# Altium PCB CW308T_MPC57.PcbDoc (part 1 of 2)
Units mil, origin at the board's own origin, x right, y up, seen from the top; angles counter-clockwise.
Board outline 2060 x 3180 mil, 4 copper layers (Component Side, Ground Plane, Power Plane, Solder Side), stack 33.234 mil thick; 90 components, 85 nets, 565 pads, 140 vias.
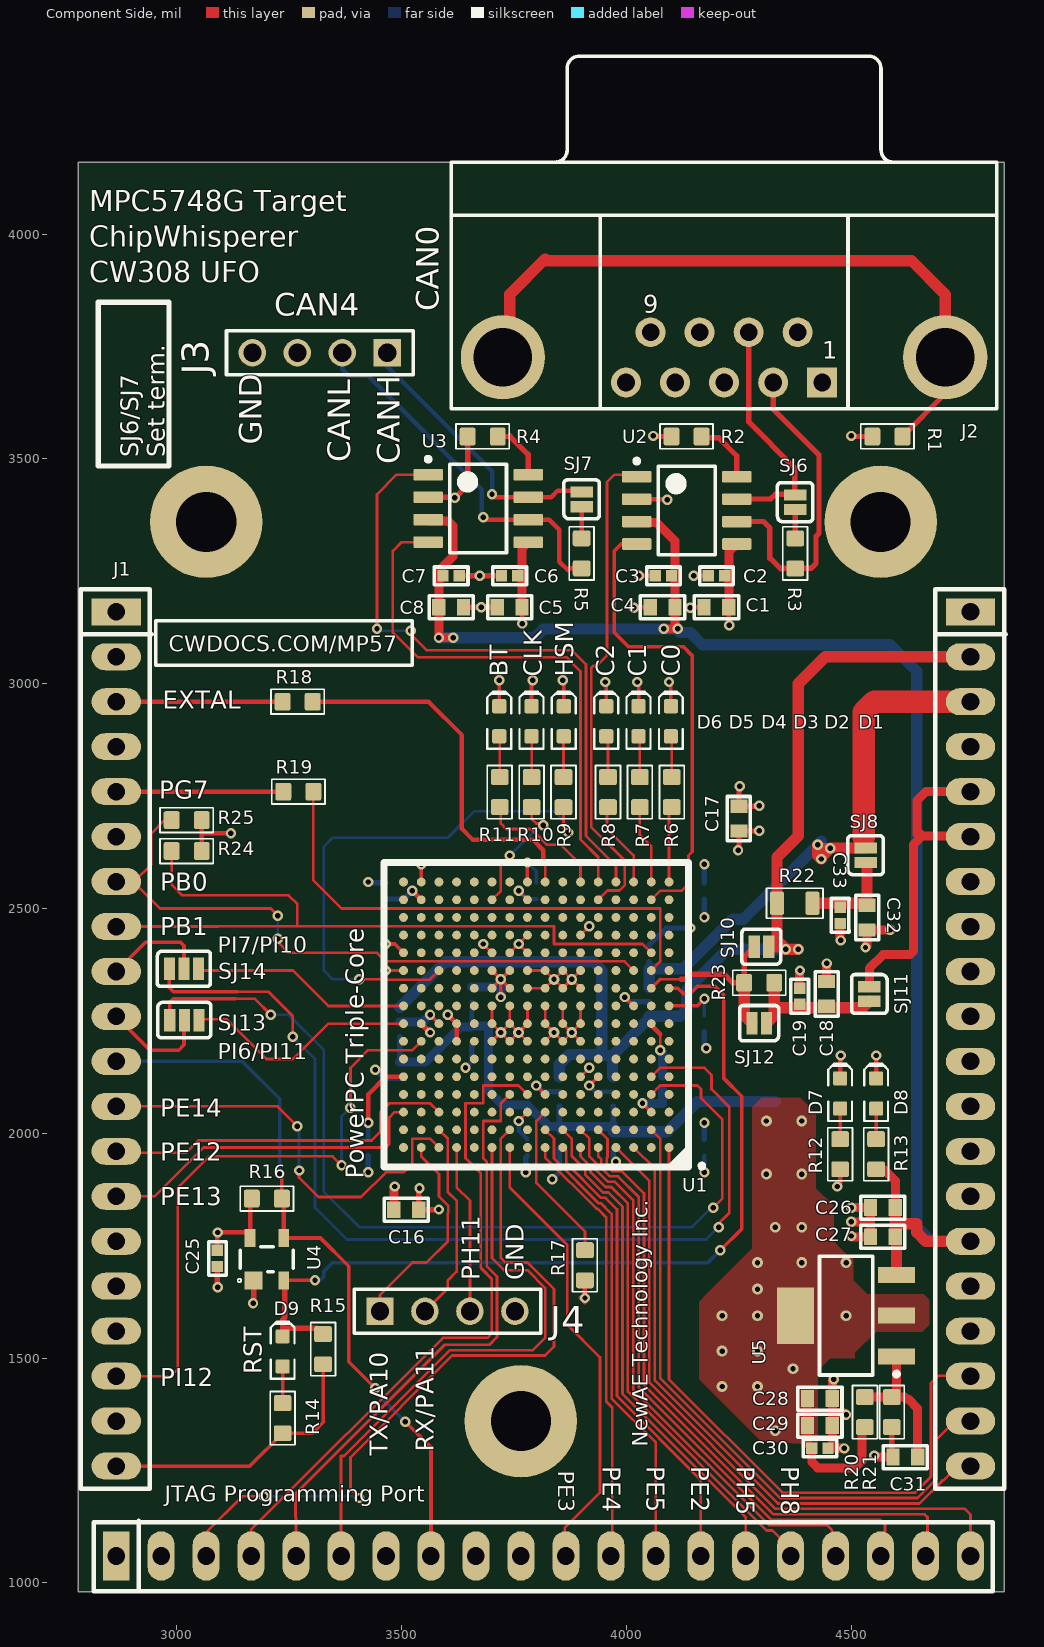
[diagram p0: Component Side view]
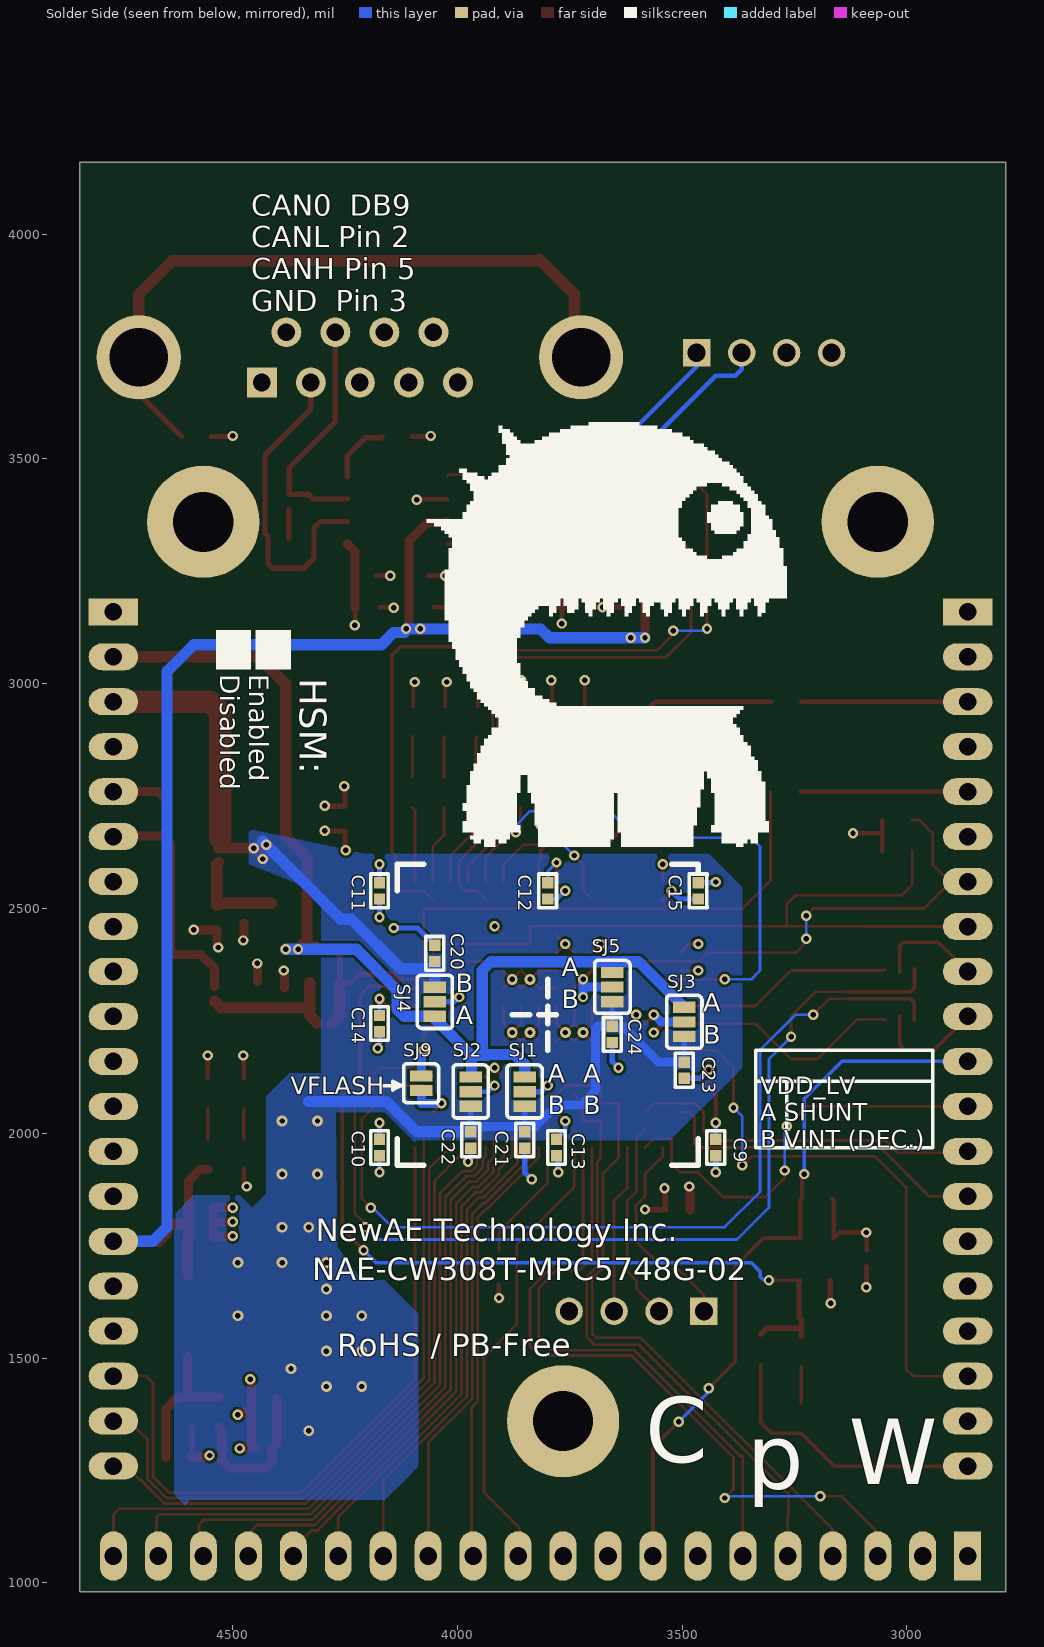
[diagram p1: Solder Side view, seen from below]
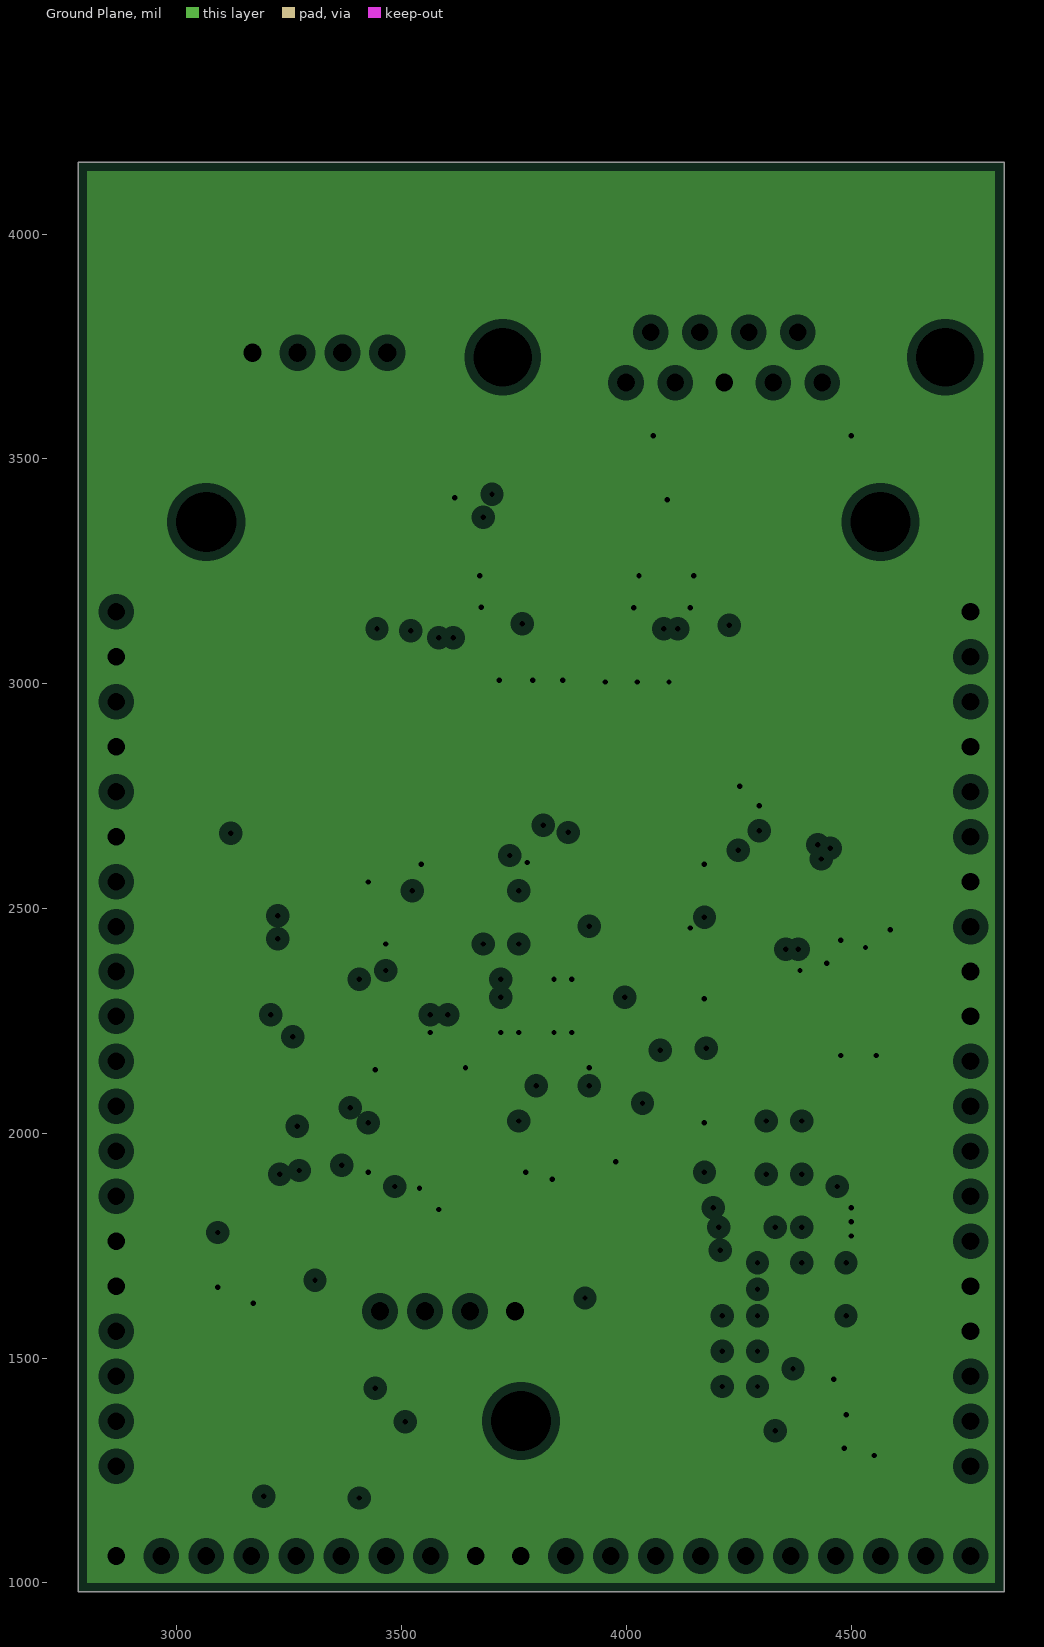
[diagram p2: Ground Plane, clearances drawn from the general rule]
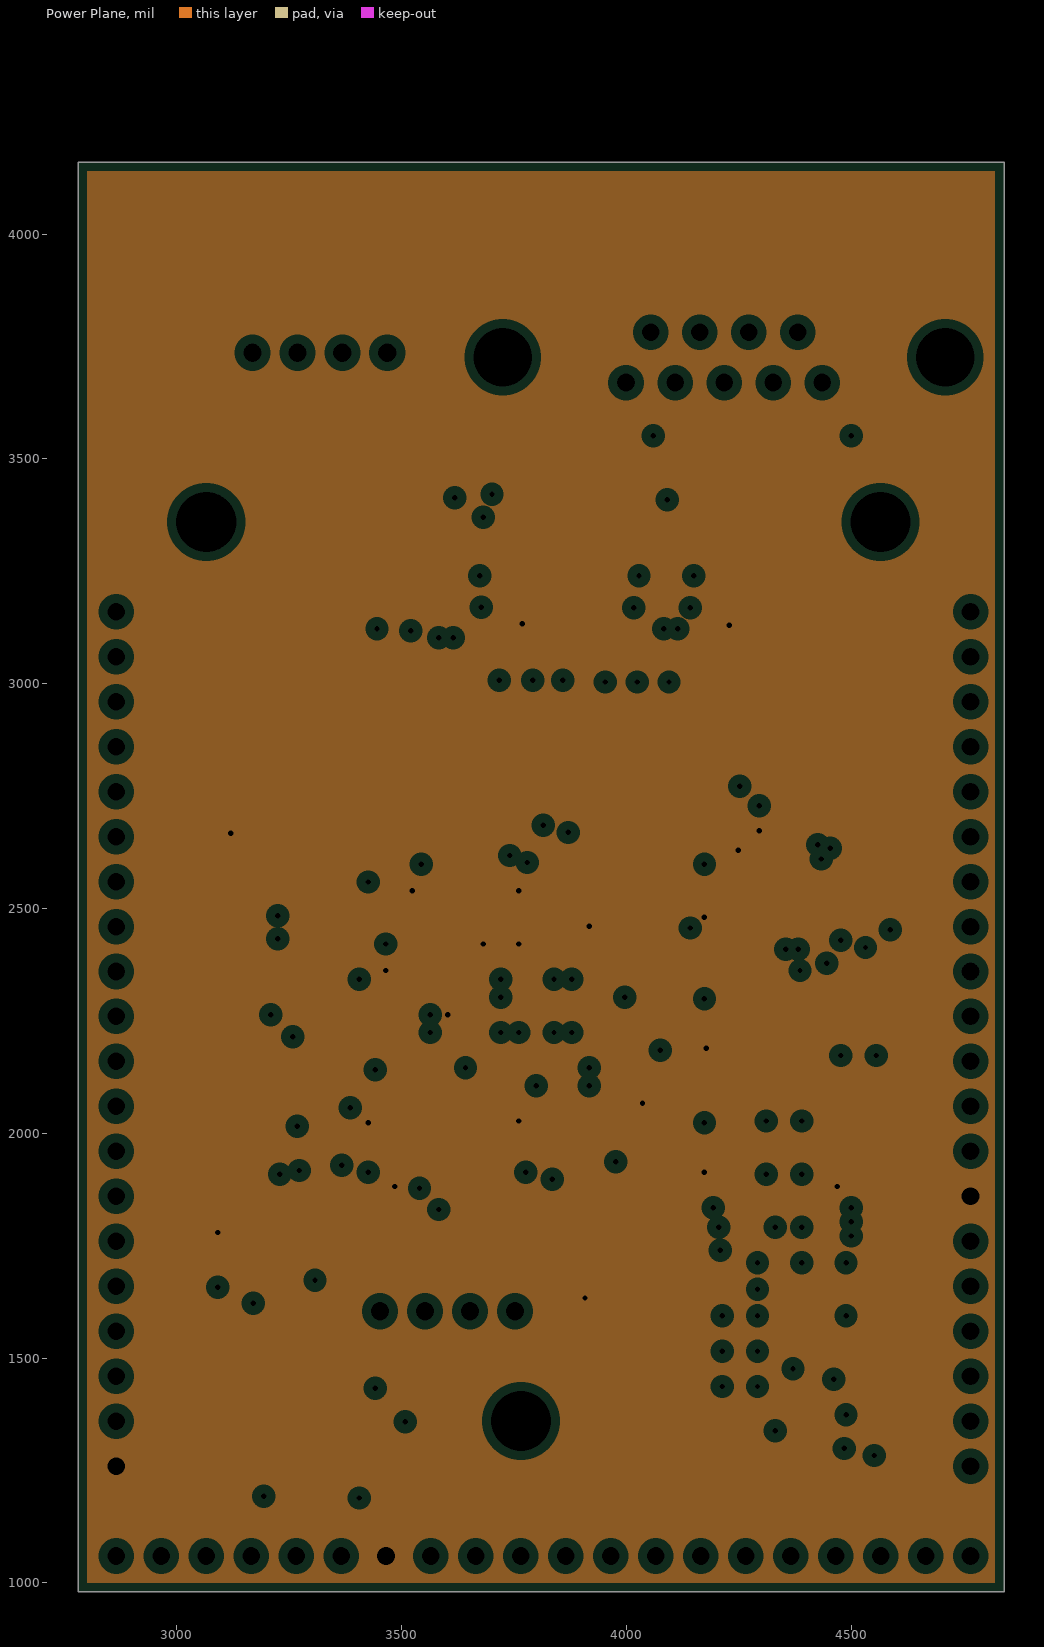
[diagram p3: Power Plane, clearances drawn from the general rule]

## Layer stack, top to bottom
Top Solder: solder mask 0.4, Solder Resist, Dk 3.5
Component Side: signal copper 1.4
Dielectric 1: core 12.6, FR-4, Dk 4.8
Ground Plane: plane copper 1.417, net GND
Dielectric 3: prepreg 5, Dk 4.2
Power Plane: plane copper 1.417, net VCCIO
Dielectric 4: core 10, Dk 4.2
Solder Side: signal copper 1.4
Bottom Solder: solder mask 0.4, Solder Resist, Dk 3.5

## Board outline
2780,980 4840,980 4840,4160 2780,4160

## Design rules (kind name [scope] priority, off if disabled: settings)
Clearance [All] p1: gap=6 ignorepadtopadclearanceinfootprint=FALSE except(0: Arc-Hole Track-Hole SMDPad-Hole THPad-Hole Via-Hole Fill-Hole Poly-Hole Region-Hole Text-Hole)
PlaneClearance [All] p1: clearance=20
PlaneConnect PlaneConnect_Via [isVia] p1: planeconnectstyle=Direct reliefexpansion=20 reliefentries=4 reliefconductorwidth=10 reliefairgap=10
PlaneConnect [All] p2: planeconnectstyle=Relief reliefexpansion=20 reliefentries=4 reliefconductorwidth=10 reliefairgap=10
PolygonConnect [All] p1: connectstyle=Direct reliefconductorwidth=10 reliefentries=4 polygonreliefangle="90 Angle" airgapwidth=10
RoutingVias [All] p1: holewidth=12 width=24 viastyle="Through Hole" minholewidth=12 minwidth=20 maxholewidth=28 maxwidth=50
SilkToSilkClearance [All] p1: silktosilkclearance=1
SilkToSolderMaskClearance [IsPad] p1: minsilkscreentomaskgap=2 clearancetoexposedcopper=TRUE
SolderMaskExpansion [All] p1: expansion=4
Width [All] p1: maxlimit=50 minlimit=6 preferedwidth=8 minimp=50.000000 maximp=50.000000 favimp=50.000000
26 further rules are at their usual default settings.

## Classes and differential pairs
component class mpc57_cpuio1: J4 R19 R24 R25
component class mpc57_clk: C25 D9 R14 R15 R16 R17 R18 U4
component class mpc57_can: C1 C2 C3 C4 C5 C6 C7 C8 J2 J3 R1 R2 R3 R4 R5 SJ6 SJ7 U2 U3
component class mpc57_cwconn: C26 C27 C28 C29 C30 C31 C32 C33 D7 D8 J1 R12 R13 R20 R21 R22 SJ8 SJ13 SJ14 U5
component class mpc57_mcupower: C9 C10 C11 C12 C13 C14 C15 C16 C17 C18 C19 C20 C21 C22 C23 C24 R23 SJ1 SJ2 SJ3 SJ4 SJ5 SJ9 SJ10 SJ11 SJ12 U1
component class mpc57_cpuio2: D1 D2 D3 D4 D5 D6 R6 R7 R8 R9 R10 R11

## Components (designator, comment, footprint, x,y, rotation, side; value= is the part's Value field where it differs from the comment)
C1 "2u2" CAPC0603_M 4200,3170 r180 top
C2 "100n" CAPC0402_M 4200,3240 r180 top
C3 "100n" CAPC0402_M 4081.89,3240 r180 top
C4 "2u2" CAPC0603_M 4080,3170 r180 top
C5 "2u2" CAPC0603_M 3740,3170 r180 top
C6 "100n" CAPC0402_M 3740,3240 r180 top
C7 "100n" CAPC0402_M 3610,3240 r0 top
C8 "2u2" CAPC0603_M 3610,3170 r0 top
C9 "100n" CAPC0402_M 3425.2,1968.5 r270 bottom
C10 "100n" CAPC0402_M 4173.23,1968.5 r90 bottom
C11 "100n" CAPC0402_M 4173.23,2539.37 r90 bottom
C12 "100n" CAPC0402_M 3799.21,2539.37 r90 bottom
C13 "100n" CAPC0402_M 3779.53,1968.5 r270 bottom
C14 "100n" CAPC0402_M 4173.23,2244.09 r90 bottom
C15 "100n" CAPC0402_M 3464.57,2539.37 r90 bottom
C16 "2u2" CAPC0603_M 3510,1830 r0 top
C17 "2u2" CAPC0603_M 4250,2700 r90 top
C18 "1u" CAPC0603_M 4445,2310 r90 top
C19 "100n" CAPC0402_M 4385,2305 r90 top
C20 "100n" CAPC0402_M 4050.31,2400.35 r90 bottom
C21 "100n" CAPC0402_M 3850.31,1985.35 r270 bottom
C22 "100n" CAPC0402_M 3970.31,1985.35 r270 bottom
C23 "100n" CAPC0402_M 3495.31,2140.35 r270 bottom
C24 "100n" CAPC0402_M 3655.31,2220.35 r270 bottom
C25 "100n" CAPC0402_M 3090,1721.89 r270 top
C26 "2u2" CAPC0603_M 4570,1835 r180 top
C27 "2u2" CAPC0603_M 4570,1770 r180 top
C28 "2u2" CAPC0603_M 4430,1410 r0 top
C29 "2u2" CAPC0603_M 4430,1350 r0 top
C30 "100n" CAPC0402_M 4430,1300 r0 top
C31 "2u2" CAPC0603_M 4620,1280 r180 top
C32 "2u2" CAPC0603_M 4535,2480 r270 top
C33 "100n" CAPC0402_M 4475,2485 r270 top
D1 "LED, 0603, Green" LED-0603-GREEN 4098.52,2916.56 r90 top
D2 "LED, 0603, Green" LED-0603-GREEN 4026.67,2916.56 r90 top
D3 "LED, 0603, Green" LED-0603-GREEN 3954.82,2916.56 r90 top
D4 "LED, 0603, Green" LED-0603-GREEN 3860.45,2916.56 r90 top
D5 "LED, 0603, Green" LED-0603-GREEN 3788.6,2916.56 r90 top
D6 "LED, 0603, Red" LED-0603-RED 3716.75,2916.56 r90 top
D7 "LED, 0603, Red" LED-0603-RED 4475,2088.62 r90 top
D8 "LED, 0603, Red" LED-0603-RED 4555,2088.62 r90 top
D9 "LED, 0603, Red" LED-0603-RED 3235,1515 r90 top
J1 "CW308_TARGETCON" CW308_TBOARD_CONN 2865,3160 r0 top locked
J2 "DRB-09P11G1R" TAIT-DRB-09P11G1R_V 4380.47,3781.81 r0 top
J3 "HMTSW-104-23-L-S-237" SMTC-HMTSW-104-23-X-S-237 3467.72,3736.22 r180 top
J4 "HMTSW-104-23-L-S-237" SMTC-HMTSW-104-23-X-S-237 3451.57,1604.33 r0 top
R1 "10R" RESC1608X55N 4580,3550 r0 top
R2 "4k7" RESC1608X55N 4133.46,3550 r0 top
R3 "120R" RESC1608X55N 4375,3290 r270 top
R4 "4k7" RESC1608X55N 3680,3550 r0 top
R5 "120R" RESC1608X55N 3900,3290 r270 top
R6 "1k" RESC1608X55N 4100.59,2758.98 r90 top
R7 "1k" RESC1608X55N 4029.65,2758.98 r90 top
R8 "1k" RESC1608X55N 3958.7,2758.98 r90 top
R9 "1k" RESC1608X55N 3859.8,2758.98 r90 top
R10 "1k" RESC1608X55N 3788.86,2758.98 r90 top
R11 "1k" RESC1608X55N 3717.91,2758.98 r90 top
R12 "1k" RESC1608X55N 4475,1953.62 r90 top
R13 "1k" RESC1608X55N 4555,1953.62 r90 top
R14 "1k" RESC1608X55N 3235,1366.54 r90 top
R15 "10k" RESC1608X55N 3325,1520 r90 top
R16 "10k" RESC1608X55N 3200,1855 r0 top
R17 "1k" RESC1608X55N 3907.48,1706.69 r90 top
R18 "22R" RESC1608X55N 3268.46,2960 r0 top
R19 "22R" RESC1608X55N 3270,2760 r180 top
R20 "120R" RESC1608X55N 4530,1380 r90 top
R21 "120R" RESC1608X55N 4590,1380 r270 top
R22 "1R0" RESC2012X70N 4374.02,2511.81 r0 top
R23 "1R0" RESC1608X55N 4295,2335 r180 top
R24 "10k" RESC1608X55N 3021.65,2627.95 r180 top
R25 "10k" RESC1608X55N 3021.65,2696.85 r180 top
SJ1 "NC" SJ_3S_NC12 3850.31,2092.8 r270 bottom
SJ2 "NC" SJ_3S_NC12 3970.31,2092.8 r270 bottom
SJ3 "NC" SJ_3S_NC12 3495.31,2247.8 r270 bottom
SJ4 "NC" SJ_3S_NC12 4050.31,2292.79 r90 bottom
SJ5 "NC" SJ_3S_NC12 3655.31,2325.35 r270 bottom
SJ6 "NC" SJ_2S_NC 4375,3403.78 r90 top
SJ7 "NC" SJ_2S_NC 3900,3410 r90 top
SJ8 "NC" SJ_2S_NC 4531.5,2618.58 r90 top
SJ9 "NC" SJ_2S_NC 4080.31,2111.57 r270 bottom
SJ10 "NO" SJ_2S_NO 4300,2415 r180 top
SJ11 "NO" SJ_2S_NO 4540,2310 r270 top
SJ12 "NC" SJ_2S_NC 4295,2245 r180 top
SJ13 "NC" SJ_3S_NC12 3016.68,2251.97 r0 top
SJ14 "NC" SJ_3S_NC12 3015.75,2366.14 r0 top
U1 "SPC5748GSK1MMJ6" BGA256C100P16X16_1700X1700X170 3799.21,2263.78 r180 top
U2 "TJA1051T/3" SOIC8_NARROW 4133.86,3385.83 r0 top
U3 "TJA1051T/3" SOIC8_NARROW 3670,3390 r0 top
U4 "STM6315RDW13F" SOT143B 3200,1720 r90 top
U5 "LD1117STR" SOT-223_L 4488.19,1594.49 r180 top

## Footprints (in the part's own frame and the unit in brackets; to place one, negate y for a bottom-side part, rotate by r counter-clockwise, add the part's x,y. Pads: shape width x height; smd on the part's side, far side on the other; paste and mask are expansions set on the pad)
BGA256C100P16X16_1700X1700X170 [mm] "BGA, 256-Leads, Body 17.00x17.00mmx1.70mm, Pitch 1.00mm"
  round 0.5 smd: A1(-7.5,7.5) A2(-6.5,7.5) A3(-5.5,7.5) A4(-4.5,7.5) A5(-3.5,7.5) A6(-2.5,7.5) A7(-1.5,7.5) A8(-0.5,7.5) A9(0.5,7.5) A10(1.5,7.5) A11(2.5,7.5) A12(3.5,7.5) A13(4.5,7.5) A14(5.5,7.5) A15(6.5,7.5) A16(7.5,7.5) B1(-7.5,6.5) B2(-6.5,6.5) B3(-5.5,6.5) B4(-4.5,6.5) B5(-3.5,6.5) B6(-2.5,6.5) B7(-1.5,6.5) B8(-0.5,6.5) B9(0.5,6.5) B10(1.5,6.5) B11(2.5,6.5) B12(3.5,6.5) B13(4.5,6.5) B14(5.5,6.5) B15(6.5,6.5) B16(7.5,6.5) C1(-7.5,5.5) C2(-6.5,5.5) C3(-5.5,5.5) C4(-4.5,5.5) C5(-3.5,5.5) C6(-2.5,5.5) C7(-1.5,5.5) C8(-0.5,5.5) C9(0.5,5.5) C10(1.5,5.5) C11(2.5,5.5) C12(3.5,5.5) C13(4.5,5.5) C14(5.5,5.5) C15(6.5,5.5) C16(7.5,5.5) D1(-7.5,4.5) D2(-6.5,4.5) D3(-5.5,4.5) D4(-4.5,4.5) D5(-3.5,4.5) D6(-2.5,4.5) D7(-1.5,4.5) D8(-0.5,4.5) D9(0.5,4.5) D10(1.5,4.5) D11(2.5,4.5) D12(3.5,4.5) D13(4.5,4.5) D14(5.5,4.5) D15(6.5,4.5) D16(7.5,4.5) E1(-7.5,3.5) E2(-6.5,3.5) E3(-5.5,3.5) E4(-4.5,3.5) E5(-3.5,3.5) E6(-2.5,3.5) E7(-1.5,3.5) E8(-0.5,3.5) E9(0.5,3.5) E10(1.5,3.5) E11(2.5,3.5) E12(3.5,3.5) E13(4.5,3.5) E14(5.5,3.5) E15(6.5,3.5) E16(7.5,3.5) F1(-7.5,2.5) F2(-6.5,2.5) F3(-5.5,2.5) F4(-4.5,2.5) F5(-3.5,2.5) F6(-2.5,2.5) F7(-1.5,2.5) F8(-0.5,2.5) F9(0.5,2.5) F10(1.5,2.5) F11(2.5,2.5) F12(3.5,2.5) F13(4.5,2.5) F14(5.5,2.5) F15(6.5,2.5) F16(7.5,2.5) G1(-7.5,1.5) G2(-6.5,1.5) G3(-5.5,1.5) G4(-4.5,1.5) G5(-3.5,1.5) G6(-2.5,1.5) G7(-1.5,1.5) G8(-0.5,1.5) G9(0.5,1.5) G10(1.5,1.5) G11(2.5,1.5) G12(3.5,1.5) G13(4.5,1.5) G14(5.5,1.5) G15(6.5,1.5) G16(7.5,1.5) H1(-7.5,0.5) H2(-6.5,0.5) H3(-5.5,0.5) H4(-4.5,0.5) H5(-3.5,0.5) H6(-2.5,0.5) H7(-1.5,0.5) H8(-0.5,0.5) H9(0.5,0.5) H10(1.5,0.5) H11(2.5,0.5) H12(3.5,0.5) H13(4.5,0.5) H14(5.5,0.5) H15(6.5,0.5) H16(7.5,0.5) J1(-7.5,-0.5) J2(-6.5,-0.5) J3(-5.5,-0.5) J4(-4.5,-0.5) J5(-3.5,-0.5) J6(-2.5,-0.5) J7(-1.5,-0.5) J8(-0.5,-0.5) J9(0.5,-0.5) J10(1.5,-0.5) J11(2.5,-0.5) J12(3.5,-0.5) J13(4.5,-0.5) J14(5.5,-0.5) J15(6.5,-0.5) J16(7.5,-0.5) K1(-7.5,-1.5) K2(-6.5,-1.5) K3(-5.5,-1.5) K4(-4.5,-1.5) K5(-3.5,-1.5) K6(-2.5,-1.5) K7(-1.5,-1.5) K8(-0.5,-1.5) K9(0.5,-1.5) K10(1.5,-1.5) K11(2.5,-1.5) K12(3.5,-1.5) K13(4.5,-1.5) K14(5.5,-1.5) K15(6.5,-1.5) K16(7.5,-1.5) L1(-7.5,-2.5) L2(-6.5,-2.5) L3(-5.5,-2.5) L4(-4.5,-2.5) L5(-3.5,-2.5) L6(-2.5,-2.5) L7(-1.5,-2.5) L8(-0.5,-2.5) L9(0.5,-2.5) L10(1.5,-2.5) L11(2.5,-2.5) L12(3.5,-2.5) L13(4.5,-2.5) L14(5.5,-2.5) L15(6.5,-2.5) L16(7.5,-2.5) M1(-7.5,-3.5) M2(-6.5,-3.5) M3(-5.5,-3.5) M4(-4.5,-3.5) M5(-3.5,-3.5) M6(-2.5,-3.5) M7(-1.5,-3.5) M8(-0.5,-3.5) M9(0.5,-3.5) M10(1.5,-3.5) M11(2.5,-3.5) M12(3.5,-3.5) M13(4.5,-3.5) M14(5.5,-3.5) M15(6.5,-3.5) M16(7.5,-3.5) N1(-7.5,-4.5) N2(-6.5,-4.5) N3(-5.5,-4.5) N4(-4.5,-4.5) N5(-3.5,-4.5) N6(-2.5,-4.5) N7(-1.5,-4.5) N8(-0.5,-4.5) N9(0.5,-4.5) N10(1.5,-4.5) N11(2.5,-4.5) N12(3.5,-4.5) N13(4.5,-4.5) N14(5.5,-4.5) N15(6.5,-4.5) N16(7.5,-4.5) P1(-7.5,-5.5) P2(-6.5,-5.5) P3(-5.5,-5.5) P4(-4.5,-5.5) P5(-3.5,-5.5) P6(-2.5,-5.5) P7(-1.5,-5.5) P8(-0.5,-5.5) P9(0.5,-5.5) P10(1.5,-5.5) P11(2.5,-5.5) P12(3.5,-5.5) P13(4.5,-5.5) P14(5.5,-5.5) P15(6.5,-5.5) P16(7.5,-5.5) R1(-7.5,-6.5) R2(-6.5,-6.5) R3(-5.5,-6.5) R4(-4.5,-6.5) R5(-3.5,-6.5) R6(-2.5,-6.5) R7(-1.5,-6.5) R8(-0.5,-6.5) R9(0.5,-6.5) R10(1.5,-6.5) R11(2.5,-6.5) R12(3.5,-6.5) R13(4.5,-6.5) R14(5.5,-6.5) R15(6.5,-6.5) R16(7.5,-6.5) T1(-7.5,-7.5) T2(-6.5,-7.5) T3(-5.5,-7.5) T4(-4.5,-7.5) T5(-3.5,-7.5) T6(-2.5,-7.5) T7(-1.5,-7.5) T8(-0.5,-7.5) T9(0.5,-7.5) T10(1.5,-7.5) T11(2.5,-7.5) T12(3.5,-7.5) T13(4.5,-7.5) T14(5.5,-7.5) T15(6.5,-7.5) T16(7.5,-7.5)
  silkscreen extent -9.47,-8.6 8.6,8.67, body extent -8.5,-8.5 8.5,8.5, height 1.7
CAPC0402_M [mm] "Chip Capacitor, 2-Leads, Body 0402, IPC Medium Density"
  rect 0.64x0.64 smd: 1(-0.46,0) 2(0.46,0)
  silkscreen extent -0.95,-0.5 0.95,0.5, body extent -0.55,-0.3 0.55,0.3, height 0.6
CAPC0603_M [mm]
  rect 0.75x0.95 smd: 1(-0.7,0) 2(0.7,0)
  silkscreen extent -1.25,-0.65 1.25,0.65, body extent -0.85,-0.45 0.85,0.45, height 0.9
CW308_TBOARD_CONN [mil]
  rect 110x60 hole 39: A1(0,0) C1(1900,0)
  oval 110x60 hole 39: A2(0,-100) A3(0,-200) A4(0,-300) A5(0,-400) A6(0,-500) A7(0,-600) A8(0,-700) A9(0,-800) A10(0,-900) A11(0,-1000) A12(0,-1100) A13(0,-1200) A14(0,-1300) A15(0,-1400) A16(0,-1500) A17(0,-1600) A18(0,-1700) A19(0,-1800) A20(0,-1900) C2(1900,-100) C3(1900,-200) C4(1900,-300) C5(1900,-400) C6(1900,-500) C7(1900,-600) C8(1900,-700) C9(1900,-800) C10(1900,-900) C11(1900,-1000) C12(1900,-1100) C13(1900,-1200) C14(1900,-1300) C15(1900,-1400) C16(1900,-1500) C17(1900,-1600) C18(1900,-1700) C19(1900,-1800) C20(1900,-1900)
  rect 60x110 hole 39: B1(0,-2100)
  oval 60x110 hole 39: B2(100,-2100) B3(200,-2100) B4(300,-2100) B5(400,-2100) B6(500,-2100) B7(600,-2100) B8(700,-2100) B9(800,-2100) B10(900,-2100) B11(1000,-2100) B12(1100,-2100) B13(1200,-2100) B14(1300,-2100) B15(1400,-2100) B16(1500,-2100) B17(1600,-2100) B18(1700,-2100) B19(1800,-2100) B20(1900,-2100)
  round 250 hole 134: MH1(200,200) MH2(900,-1800) MH2(1700,200)
  silkscreen extent -79,-2179 1979,50, body extent -50,-2149 1950,50, height 48
LED-0603-GREEN [mm]
  round 0.254 on Mech15: 0(0,0)
  rrect25% 0.8x0.8 smd: A(-0.85,0) K(0.85,0)
  Component Side pour cut-out: -0.5,0.5 0.5,0.5 0.5,-0.5 -0.5,-0.5
  silkscreen extent -1.55,-0.67 1.68,0.67, body extent -0.8,-0.4 0.8,0.4, height 0.75
LED-0603-RED [mm]
  round 0.254 on Mech15: 0(0,0)
  rrect25% 0.8x0.8 smd: A(-0.85,0) K(0.85,0)
  Component Side pour cut-out: -0.5,0.5 0.5,0.5 0.5,-0.5 -0.5,-0.5
  silkscreen extent -1.55,-0.67 1.68,0.67, body extent -0.8,-0.4 0.8,0.4, height 0.75
RESC1608X55N [mm] "Chip Resistor, Body 1.6x0.8mm, EIA 0603, IPC Medium Density"
  round 0.254 on Mech15: 0(0,0)
  rrect25% 0.9x1 smd: 1(-0.85,0) 2(0.85,0)
  Component Side pour cut-out: -0.6,0.5 -0.4,0.7 0.4,0.7 0.6,0.5 0.6,-0.5 0.4,-0.7 -0.4,-0.7 -0.6,-0.5
  silkscreen extent -1.5,-0.7 1.5,0.7, body extent -0.87,-0.47 0.88,0.48, height 0.54
RESC2012X70N [mm] "Chip Resistor, Body 2.0x1.2mm, EIA 0805, IPC Medium Density"
  round 0.254 on Mech15: 0(0,0)
  rrect25% 0.8x1.3 smd: 1(-1,0) 2(1,0)
  Component Side pour cut-out: -0.725,0.65 -0.525,0.85 0.525,0.85 0.725,0.65 0.725,-0.65 0.525,-0.85 -0.525,-0.85 -0.725,-0.65
  silkscreen extent -1.6,-0.85 1.6,0.85, body extent -1.1,-0.67 1.1,0.68, height 0.69
SJ_2S_NC [mil] "Solder Jumper, closed with solder paste"
  rect 25x50 smd: 1(-16.22,0) 2(16.22,0)
  silkscreen extent -43,-39 43,39
SJ_2S_NO [mil] "Solder Jumper, open (no paste)"
  rect 25x50 smd paste-393.7: 1(-16.22,0) 2(16.22,0)
  silkscreen extent -43,-39 43,39
SJ_3S_NC12 [mil] "3-Way Solder Jumper, pads 1-2 closed"
  rect 25x50 smd: 1(-32.43,0) 2(0,0)
  rect 25x50 smd paste-393.7: 3(32.44,0)
  silkscreen extent -60,-39 59,39
SMTC-HMTSW-104-23-X-S-237 [mm] "Terminal Strip, 1x2 Pins, Vertical, 2.54mm Pitch, Male"
  rect 1.55x1.55 hole 1.02: 1(0,0)
  round 1.55 hole 1.02: 2(2.54,0) 3(5.08,0) 4(7.62,0)
  silkscreen extent -1.46,-1.24 9.08,1.24, body extent -1.27,-1.27 8.89,1.27, height 8.56
SOIC8_NARROW [mm] "SOIC, 8-Leads, Body 5x4mm, Pitch 1.27mm, IPC Low Density"
  rrect15% 1.65x0.65 smd: 1(-2.825,1.905) 2(-2.825,0.635) 3(-2.825,-0.635) 4(-2.825,-1.905) 5(2.825,-1.905) 6(2.825,-0.635) 7(2.825,0.635) 8(2.825,1.905)
  silkscreen extent -2.95,-2.5 1.6,2.9, body extent -3,-2.45 3,2.45, height 1.63
SOT143B [mm] "SOT143, 4-Leads, Body 2.92x2.37mm, Pitch 1.90mm, IPC Medium Density"
  rect 1x1 smd: 1(-1.2,0.75)
  rect 1x0.6 smd: 2(-1.2,-0.95) 3(1.2,-0.95) 4(1.2,0.95)
  silkscreen extent -1.3,-1.5 0.7,1.65, body extent -1.18,-1.52 1.18,1.52, height 1.2
SOT-223_L [mm] "SOT223, 4-Leads, Body 6.5x3.5mm, Pitch 2.3mm, Lead Span 7mm, IPC High Density"
  rect 2.1x0.9 smd: 1(-2.85,2.3) 2(-2.85,0) 3(-2.85,-2.3)
  rect 2.1x3.2 smd: 4(2.85,0)
  silkscreen extent -2.98,-3.35 1.5,3.42, body extent -1.85,-3.35 1.85,3.35, height 1.8
TAIT-DRB-09P11G1R_V [mm] "Connector, D-Sub R/A  Male Connector, 2.77 mm Pitch"
  rect 1.69x1.69 hole 0.991: 1(1.385,-2.84)
  round 1.69 hole 0.991: 2(-1.385,-2.84) 3(-4.155,-2.84) 4(-6.925,-2.84) 5(-9.695,-2.84) 6(0,0) 7(-2.77,0) 8(-5.54,0) 9(-8.31,0)
  round 4.76 hole 3.3: 10(-16.65,-1.42) 11(8.34,-1.42)
  silkscreen extent -19.56,-4.32 11.24,15.6, body extent -19.85,-4.33 11.47,16.38, height 12.66

## Part data
C1 C4 C5 C8 C16 C17 C26 C27 C28 C29 C31 C32: library part CCHIP-2u2-0603, "2u2, 0603", Case-EIA=0603, Case-Metric=1608, Component Type=Standard, Mounting Technology=SMT, Part Number=CCHIP-2u2-0603, Pin Count=2
C2 C3 C6 C7 C9 C10 C11 C12 C13 C14 C15 C19 C20 C21 C22 C23 C24 C25 C30 C33: library part CCHIP-100n-0402, "100n, 0402", Case-EIA=0402, Component Type=Standard, Mounting Technology=SMT, Part Number=CCHIP-100n-0402, Pin Count=2
C18: library part CCHIP-1u-0603, "1u, 0603", Case-EIA=0603, Case-Metric=1608, Component Type=Standard, Mounting Technology=SMT, Part Number=CCHIP-1u-0603, Pin Count=2
D1 D2 D3 D4 D5: library part LEDCHIP_0603_GREEN, "Chip LED, Green", Component Type=Standard, Mounting Technology=SMT, Part Number=LEDCHIP_0603_GREEN, Pin Count=2
D6 D7 D8 D9: library part LEDCHIP_0603_RED, "Chip LED, Red", Component Type=Standard, Mounting Technology=SMT, Part Number=LEDCHIP_0603_RED, Pin Count=2
J1: library part CW308_TBOARD, "CW308 \"Standard\" Target Board Connector"
J2: library part CMP-0264-00001-1, "DB9 R/A Connector, Through-hole, Male", ComponentLink1Description="Manufacturer URL", ComponentLink1URL=http://www.taitek.com/, ComponentLink2Description=Datasheet, ComponentLink2URL=http://www.taitek.com/connects_prod_info.asp?id=A100011, Mounting Technology="Through Hole", PackageDescription="9-Pin D-Sub R/A  Male Connector, 2.77 mm Pitch", PackageReference=DRB-09P11G1R, PartNumber=DRB-09P11G1R
J3 J4: library part CMP-1024-00020-1, Manufacturer=Samtec, Temperature Range="-55 to 125 degC", ComponentLink1Description="Manufacturer URL", ComponentLink1URL=http://www.samtec.com, ComponentLink2Description=Datasheet, ComponentLink2URL=http://www.samtec.com/documents/webfiles/pdf/HMTSW.PDF, ComponentLink3Description="Package Specification", ComponentLink3URL=http://www.samtec.com/documents/webfiles/cpdf/HMTSW-XXX-XX-X-X-XXXX-XX-XX-MKT1.pdf, DatasheetVersion=F-214, Mounting Technology=Through-hole, Orientation=Vertical, PackageDescription="Assembly .025 [.64] SQ. Post Hi-Temp Terminal Strip", PackageReference=HMTSW-104-23-X-S-237, PackageVersion="AL, 3/1987", PartNumber=HMTSW-104-23-L-S-237, Pitch="2.54 mm", RoHS=True
R1: library part RCHIP-10R-0603, "10R res, 0603, 1%, 1/10W", Case-EIA=0603, Case-Metric=1608, Manufacture 1=Yageo, Manufacture Part Number 1=RC0603FR-0710RL, Rated Power=0.1W, Rated Voltage=75VDC, Supplier Part Number 1=311-10.0HRCT-ND, Temperature Range="-55C to 155C", Tolerance=1%, Component Type=Standard, Mounting Technology=SMT, Part Number=RCHIP-10R-0603, Pin Count=2, Supplier 1=Digi-Key
R2 R4: library part RCHIP-4K7-0603, "4k7 res, 0603, 1%, 1/10W", Case-EIA=0603, Case-Metric=1608, Manufacture 1=Yageo, Manufacture Part Number 1=RC0603FR-074K7L, Rated Power=0.1W, Rated Voltage=75VDC, Supplier Part Number 1=311-4.70KHRCT-ND, Temperature Range="-55C to 155C", Tolerance=1%, Component Type=Standard, Mounting Technology=SMT, Part Number=RCHIP-4K7-0603, Pin Count=2, Supplier 1=Digi-Key
R3 R5 R20 R21: library part RCHIP-120R-0603, "120R res, 0603, 1%, 1/10W", Case-EIA=0603, Case-Metric=1608, Manufacture 1=Yageo, Manufacture Part Number 1=RC0603FR-07120RL, Rated Power=0.1W, Rated Voltage=75VDC, Supplier Part Number 1=311-120HRCT-ND, Temperature Range="-55C to 155C", Tolerance=1%, Component Type=Standard, Mounting Technology=SMT, Part Number=RCHIP-120R-0603, Pin Count=2, Supplier 1=Digi-Key
R6 R7 R8 R9 R10 R11 R12 R13 R14 R17: library part RCHIP-1K-0603, "1k res, 0603, 1%, 1/10W", Case-EIA=0603, Case-Metric=1608, Manufacture 1=Yageo, Manufacture Part Number 1=RC0603FR-071KL, Rated Power=0.1W, Rated Voltage=75VDC, Supplier Part Number 1=311-1.00KHRCT-ND, Temperature Range="-55C to 155C", Tolerance=1%, Component Type=Standard, Mounting Technology=SMT, Part Number=RCHIP-1K-0603, Pin Count=2, Supplier 1=Digi-Key
R15 R16 R24 R25: library part RCHIP-10K-0603, "10k res, 0603, 1%, 1/10W", Case-EIA=0603, Case-Metric=1608, Manufacture 1=Yageo, Manufacture Part Number 1=RC0603FR-0710KL, Rated Power=0.1W, Rated Voltage=75VDC, Supplier Part Number 1=311-10.0KHRCT-ND, Temperature Range="-55C to 155C", Tolerance=1%, Component Type=Standard, Mounting Technology=SMT, Part Number=RCHIP-10K-0603, Pin Count=2, Supplier 1=Digi-Key
R18 R19: library part RCHIP-22R-0603, "22R res, 0603, 1%, 1/10W", Case-EIA=0603, Case-Metric=1608, Manufacture 1=Yageo, Manufacture Part Number 1=RC0603FR-0722RL, Rated Power=0.1W, Rated Voltage=75VDC, Supplier Part Number 1=311-22.0HRCT-ND, Temperature Range="-55C to 155C", Tolerance=1%, Component Type=Standard, Mounting Technology=SMT, Part Number=RCHIP-22R-0603, Pin Count=2, Supplier 1=Digi-Key
R22: library part RCHIP-1R0-0805, "1R0 res, 0805, 1%, 1/8W", Case-EIA=0805, Manufacture 1=Yageo, Manufacture Part Number 1=RC0805FR-071RL, Rated Power=0.125W, Rated Voltage=75VDC, Supplier Part Number 1=311-1.00CRCT-ND, Temperature Range="-55C to 155C", Tolerance=1%, Component Type=Standard, Mounting Technology=SMT, Part Number=RCHIP-1R0-0805, Pin Count=2, Supplier 1=Digi-Key
R23: library part RCHIP-1R0-0603, "1R0 res, 0603, 1%, 1/10W", Case-EIA=0603, Case-Metric=1608, Manufacture 1=Yageo, Manufacture Part Number 1=RC0603FR-071RL, Rated Power=0.1W, Rated Voltage=75VDC, Supplier Part Number 1=311-1.00HRCT-ND, Temperature Range="-55C to 155C", Tolerance=1%, Component Type=Standard, Mounting Technology=SMT, Part Number=RCHIP-1R0-0603, Pin Count=2, Supplier 1=Digi-Key
SJ1 SJ2 SJ3 SJ4 SJ5 SJ13 SJ14: library part SJ_3S_12JMP, "Solder Jumper, NC", Component Type="Standard (No BOM)", Part Number=SJ_3S_12JMP, Pin Count=3
  SJ13 SJ14: Component Group="PCB Feature", Mounting Technology=COPPER
SJ6 SJ7 SJ8 SJ9 SJ12: library part SJ_2S, "Solder Jumper, NC", Component Type="Standard (No BOM)", Part Number=SJ_2S, Pin Count=2
SJ10 SJ11: library part SJ_2S_NO, "Solder Jumper, NO", Component Type="Standard (No BOM)", Mounting Technology=COPPER, Part Number=SJ_2S_NO, Pin Count=2
U1: "Freescale 32-bit MCU, Triple core, 6MB Flash, 160MHz, -40/+125degC, Automotive Qualified, BGA 256"
U2 U3: library part TJA1051T_3, "CAN-FD Transceiver, 3.3V", Supplier Part Number 1=568-8684-1-ND, ComponentLink1Description=Datasheet, ComponentLink1URL=http://www.nxp.com/documents/data_sheet/TJA1051.pdf, Component Type=Standard, Mounting Technology="Surface Mount", Part Number=TJA1051T_3, Pin Count=8, Supplier 1=Digi-Key
U4: "2.93V Reset Controller, 112mS", Manufacture 1="ST Microelectronics", Supplier Part Number 1=497-5127-1-ND, Temperature Range="-40C to 125C", Component Type=Standard, Manufacture Part Number 1=STM6315RDW13F, Mounting Technology=SMT, Part Number=STM6315RDW13F, Pin Count=4, Pitch=1.92mm, RoHS=Yes, Supplier 1=Digi-Key
U5: library part CMP-0244-00313-1, "Adjustable Low Drop Voltage Regulator, 1.25 to 15V, 4-Pin SOT-223, Tape and Reel", Supplier Part Number 1=497-1244-1-ND, ComponentLink1Description="Manufacturer URL", ComponentLink1URL=http://www.st.com, ComponentLink2Description=Datasheet, ComponentLink2URL=http://www.st.com/internet/com/TECHNICAL_RESOURCES/TECHNICAL_LITERATURE/DATASHEET/CD00000544.pdf, DatasheetVersion=1/11/2011, PackageDescription="4-Pin SOT-223 Package, 6.5 x 3.5 mm Body, 2.3 mm Pitch, 7 mm Lead Span", PackageReference=SOT-223, PackageVersion=2010, Supplier 1=Digi-Key

## Via types
v1: diameter 23, hole 12, Component Side to Solder Side, tented both sides, 114 vias
v2: diameter 24, hole 12, Component Side to Solder Side, tented both sides, 25 vias
v3: diameter 23, hole 12, Component Side to Solder Side, 1 vias

## Nets (pads, with @x,y where several pads share a name; then routed paths per layer and width w, separated by ;. In a path a pad name is that pad's centre, name@x,y a point inside that pad or via, vN(x,y) a via of type N, cw(c..) or ccw(c..) an arc to the next point about the centre after c; other vN are vias at no path point)
CAN0RX: U1.R2 U2.4 | length 1040.8
  Component Side w6: U1.R2@4055.12,2519.69 4074.8,2539.37 4122.05,2539.37 4137.8,2555.12 4137.8,2618.11 4145.67,2625.98
  Component Side w8: U2.4@4022.64,3310.83 3988.39,3310.83 3988.19,3311.02 3972.44,3295.28 3972.44,3114.17 4003.94,3082.68 4125.98,3082.68 4145.67,3062.99 4145.67,2625.98
CAN0TX: U1.R5 U2.1 | length 1093.2
  Component Side w6: U1.R5@3937.01,2519.69 3957.54,2540.21 3984.18,2540.21 3996.06,2552.09 3996.06,2606.3 3921.64,2680.72 3921.64,3035.81 3925.2,3039.37 3933.07,3039.37 3956.69,3062.99 3956.69,3448.82 3972.44,3464.57 4018.9,3464.57 U2.1@4022.64,3460.83
CAN4RX: U1.T5 U3.4 | length 1205.7
  Component Side w6: U3.4@3558.78,3315 3500.04,3315 3480.32,3295.28 3480.32,3114.17 3535.43,3059.06 3866.14,3059.06 3897.64,3027.56 3897.64,2653.54 3937.01,2614.17 U1.T5@3937.01,2559.06
CAN4TX: U1.T4 U3.1 | length 1445
  Component Side w6: v1(3444.88,3122.05) 3444.88,3421.26 3488.62,3465 U3.1@3558.78,3465 ; v1(3519.68,3118.11) 3519.68,3110.24 3555.12,3074.8 3877.95,3074.8 3909.64,3043.12 3909.64,2661.23 3976.38,2594.49 U1.T4@3976.38,2559.06
  Solder Side w6: v1(3444.88,3122.05) 3448.82,3118.11 v1(3519.68,3118.11)
CLKIN: J1.A5 R19.2 | length 371.5
  Component Side w10: J1.A5@2865,2760 R19.2@3236.54,2760
CLKOUT: J1.A3 R18.1 | length 370
  Component Side w10: J1.A3@2865,2960 R18.1@3235,2960
CS: J1.A18 U1.G15 | length 1354.8
  Component Side w6: J1.A18@2865,1460 2985.59,1460 3001.97,1476.38 3001.97,1879.92 3070.87,1948.82 3346.46,1948.82 v1(3366.14,1929.13) ; v1(3385.83,2057.09) 3385.83,2145.67 3425.2,2185.04 3523.62,2185.04 U1.G15@3543.31,2204.72
  Solder Side w6: v1(3366.14,1929.13) 3366.14,2037.4 v1(3385.83,2057.09)
GND: C1.2 C2.2 C3.2 C4.2 C5.2 C6.2 C7.2 C8.2 C9.2 C10.2 C11.2 C12.2 C13.2 C14.2 C15.2 C16.2 C17.2 C18.2 C19.2 C20.2 C21.2 C22.2 C23.2 C24.2 C25.2 C26.2 C27.2 C28.2 C29.2 C30.2 C31.2 C32.2 C33.2 D1.K D2.K D3.K D4.K D5.K D6.K D7.K D8.K J1.A2 J1.A4 J1.A6 J1.A15 J1.A16 J1.B1 J1.B9 J1.B10 J1.C1 J1.C4 J1.C7 J1.C9 J1.C10 J1.C16 J1.C17 J2.3 J3.4 J4.4 R1.1 R2.1 R4.1 R21.2 U1.E6 U1.G6 U1.G7 U1.G8 U1.G9 U1.G10 U1.G11 U1.H6 U1.H7 U1.H8 U1.H9 U1.H10 U1.H11 U1.H15 U1.J1 U1.J6 U1.J7 U1.J8 U1.J9 U1.J10 U1.J11 U1.K6 U1.K7 U1.K8 U1.K9 U1.L6 U1.L7 U1.L8 U1.L9 U1.M16 U1.T9 U1.T15 U2.2 U3.2 U4.1 | length 4024.5
  Component Side w6: U1.J11@3700.79,2283.46 U1.H11@3700.79,2244.09 v2(3720.47,2224.41) ; U1.J10@3740.16,2283.46 U1.H10@3740.16,2244.09 ; U1.G9@3779.53,2204.72 v2(3759.84,2224.41) ; U1.H9@3779.53,2244.09 U1.J9@3779.53,2283.46 ; U1.K9@3779.53,2322.83 U1.K8@3818.9,2322.83 v2(3838.58,2342.52) ; U1.L9@3779.53,2362.2 U1.L8@3818.9,2362.2 v2(3838.58,2342.52) ; U1.G8@3818.9,2204.72 v2(3838.58,2224.41) U1.G7@3858.27,2204.72 v2(3877.95,2224.41) ; U1.H8@3818.9,2244.09 U1.J8@3818.9,2283.46 ; U1.H7@3858.27,2244.09 U1.J7@3858.27,2283.46 ; U1.E6@3897.64,2125.98 v1(3917.32,2145.67) ; U1.G6@3897.64,2204.72 v2(3877.95,2224.41) ; U1.J6@3897.64,2283.46 U1.H6@3897.64,2244.09 v2(3877.95,2224.41) ; U1.K6@3897.64,2322.83 v2(3877.95,2342.52) ; U1.L6@3897.64,2362.2 v2(3877.95,2342.52) ; v2(3720.47,2224.41) U1.G10@3740.16,2204.72 v2(3759.84,2224.41) ; v2(3720.47,2224.41) U1.H10@3740.16,2244.09 ; U1.H10@3740.16,2244.09 v2(3759.84,2224.41) ; v2(3838.58,2342.52) U1.L7@3858.27,2362.2 v2(3877.95,2342.52) ; v2(3838.58,2342.52) U1.K7@3858.27,2322.83 v2(3877.95,2342.52)
  Component Side w8: v1(3464.57,2421.26) 3484.25,2421.26 U1.M16@3503.94,2401.57 ; U1.T15@3543.31,2559.06 v1(3543.31,2598.43) ; U1.G11@3700.79,2204.72 v2(3720.47,2224.41) ; v1(3716.54,3007.87) 3716.75,3007.66 D6.K@3716.75,2950.02 ; v2(3759.84,2224.41) U1.H9@3779.53,2244.09 ; U1.T9@3779.53,2559.06 v1(3779.53,2602.36) ; D5.K@3788.6,2950.02 3788.6,3005.14 v1(3791.34,3007.87) ; U1.H8@3818.9,2244.09 v2(3838.58,2224.41) ; U1.H7@3858.27,2244.09 v2(3877.95,2224.41) ; U1.K7@3858.27,2322.83 v2(3877.95,2342.52) ; v1(3858.27,3007.87) 3860.45,3005.69 D4.K@3860.45,2950.02 ; v1(3952.76,3003.94) 3954.82,3001.87 D3.K@3954.82,2950.02 ; v1(4023.62,3003.94) 4026.67,3000.89 D2.K@4026.67,2950.02 ; U1.J1@4094.49,2283.46 4157.48,2283.46 v1(4173.23,2299.21) ; v1(4094.49,3003.94) 4098.52,2999.9 D1.K@4098.52,2950.02
  Component Side w10: v1(4015.75,3169.29) 4016.46,3170 C4.2@4052.44,3170 ; U2.2@4022.64,3410.83 4089.17,3410.83 v1(4090.55,3409.45) ; v1(4027.56,3240.16) 4027.72,3240 C3.2@4063.78,3240 ; v1(4141.73,3169.29) 4142.44,3170 C1.2@4172.44,3170 ; v1(4149.61,3240.16) 4153.54,3240.16 4153.7,3240 C2.2@4181.89,3240 ; D7.K@4475,2122.09 4475,2171.85 v1(4476.38,2173.23) ; D8.K@4555,2122.09 4555.12,2122.2 v1(4555.12,2173.23)
  Component Side w12: C25.2@3090,1703.78 3090,1654.09 3090.55,1653.54 v1(3090.55,1657.48) ; v1(3169.29,1622.05) 3170.47,1623.23 U4.1@3170.47,1672.76 ; v1(3539.37,1877.95) 3537.56,1876.14 C16.2@3537.56,1830 3581.97,1830 v1(3582.68,1830.71) ; U1.H15@3543.31,2244.09 v1(3562.99,2224.41) ; U3.2@3558.78,3415 3616.5,3415 v1(3618.11,3413.39) 3646.54,3441.81 R4.1@3646.54,3550 ; C7.2@3628.11,3240 3673.07,3240 v1(3673.23,3240.16) 3673.39,3240 C6.2@3721.89,3240 ; C8.2@3637.56,3170 v1(3677.17,3170) C5.2@3712.44,3170 ; v1(4059.06,3551.18) 4066.93,3551.18 4068.11,3550 R2.1@4100,3550 ; v1(4251.97,2771.65) 4250,2769.68 C17.2@4250,2727.56 4294.49,2727.56 v1(4295.28,2728.35) ; v1(4500,3551.18) 4501.18,3550 R1.1@4546.54,3550 ; R21.2@4590,1346.54 4590,1282.44 C31.2@4592.44,1280
  Component Side w20: C19.2@4385,2323.11 4385,2361.38 v1(4385.83,2362.2) ; v1(4444.88,2377.95) 4445,2377.83 C18.2@4445,2337.56 ; v1(4460.63,1452.76) 4457.56,1449.68 C28.2@4457.56,1410 4457.56,1377.95 ; C33.2@4475,2466.89 4475,2430.51 v1(4476.38,2429.13) ; v1(4484.25,1299.21) 4483.46,1300 C30.2@4448.11,1300 4457.56,1309.45 C29.2@4457.56,1350 4457.56,1377.95 ; v1(4488.19,1374.02) 4484.25,1377.95 4457.56,1377.95 ; v1(4500,1771.65) 4501.65,1770 C27.2@4542.44,1770 4542.44,1802.5 ; v1(4500,1803.15) 4500.65,1802.5 4542.44,1802.5 ; v1(4500,1834.65) 4500.35,1835 C26.2@4542.44,1835 4542.44,1802.5 ; v1(4531.5,2413.39) 4535,2416.89 C32.2@4535,2452.44 4586.3,2452.44 v1(4586.61,2452.76) ; v1(4551.18,1283.46) 4554.65,1280 C31.2@4592.44,1280
  Solder Side w8: v1(3779.53,2602.36) 3799.21,2582.68 C12.2@3799.21,2557.48 ; C14.2@4173.23,2262.2 v1(4173.23,2299.21)
  Solder Side w12: v1(3425.2,1913.39) C9.2@3425.2,1950.39 ; v1(3425.2,2559.06) 3426.77,2557.48 C15.2@3464.57,2557.48 ; v1(3440.94,2141.73) 3460.43,2122.24 C23.2@3495.31,2122.24 ; v1(3641.73,2145.67) 3655.31,2159.25 C24.2@3655.31,2202.24 ; v1(3775.59,1913.39) 3775.59,1946.46 C13.2@3779.53,1950.39 ; v1(3834.65,1897.64) 3850.31,1913.31 C21.2@3850.31,1967.24 ; C22.2@3970.31,1967.24 3970.31,1943.07 v1(3976.38,1937.01) ; C20.2@4050.31,2418.46 4088.54,2456.69 v1(4141.73,2456.69) ; C10.2@4173.23,1986.61 v1(4173.23,2023.62) ; C11.2@4173.23,2557.48 v1(4173.23,2598.43)
GPIO3: J1.A9 SJ14.2 | length 240.1
  Component Side w8: J1.A9@2865,2360 2930.2,2425.2 3007.87,2425.2 3015.75,2417.32 SJ14.2@3015.75,2358.27
GPIO3_HSM: SJ14.1 U1.E2 | length 2252.1
  Component Side w6: 3133.86,2314.96 3203.44,2314.96 3257.87,2260.53 v1(3257.87,2214.57) ; U1.E2@4055.12,2125.98 4074.8,2145.67 4173.23,2145.67 4188.98,2129.92 4188.98,2098.43 4228.35,2059.06 4228.35,1822.83 4196.85,1791.34 v1(4204.72,1791.34)
  Component Side w8: SJ14.1@2983.32,2366.14 2983.32,2323.77 2992.13,2314.96 3133.86,2314.96
  Solder Side w6: v1(3257.87,2214.57) 3307.09,2165.35 3307.09,1834.65 3377.95,1763.78 4177.17,1763.78 v1(4204.72,1791.34)
GPIO3_MCU: SJ14.3 U1.J16 | length 490
  Component Side w6: SJ14.3@3048.19,2366.14 3052.13,2362.2 3257.87,2362.2 3336.61,2283.46 U1.J16@3503.94,2283.46
GPIO4: J1.A10 SJ13.2 | length 250.1
  Component Side w8: J1.A10@2865,2260 2939.96,2185.04 3003.94,2185.04 3015.75,2196.85 3015.75,2258.91 SJ13.2@3014.81,2259.84
GPIO4_HSM: SJ13.1 U1.D2 | length 2077.3
  Component Side w6: 3129.92,2299.21 3173.23,2299.21 v1(3208.66,2263.78) ; U1.D2@4055.12,2086.61 4074.8,2106.3 4157.48,2106.3 4165.35,2098.43 4165.35,2078.74 4212.6,2031.5 4212.6,1854.33 v1(4192.91,1834.65)
  Component Side w8: SJ13.1@2984.25,2251.97 2984.25,2291.34 2992.13,2299.21 3129.92,2299.21
  Solder Side w6: v1(3208.66,2263.78) 3248.03,2263.78 3326.77,2185.04 3326.77,1870.08 3405.51,1791.34 4145.67,1791.34 4188.98,1834.65 v1(4192.91,1834.65)
GPIO4_MCU: SJ13.3 U1.H16 | length 524.9
  Component Side w6: SJ13.3@3049.13,2251.97 3051.1,2253.94 3110.24,2253.94 3198.82,2165.35 3257.87,2165.35 3336.61,2244.09 U1.H16@3503.94,2244.09
HDR1: J1.B11 U1.A10 | length 1025.4
  Component Side w6: U1.A10@3740.16,1968.5 3740.16,1879.92 3868.11,1751.97 3868.11,1574.8 3940.94,1501.97 3940.94,1200.79 3862.2,1122.05 3862.2,1062.8 J1.B11@3865,1060
HDR2: J1.B12 U1.A8 | length 973.2
  Component Side w6: U1.A8@3818.9,1968.5 3818.9,1946.7 3933.09,1832.51 3935.21,1832.51 3954.8,1812.91 3954.8,1403.46 3968.5,1389.76 3968.5,1063.5 J1.B12@3965,1060
HDR3: J1.B13 U1.B8 | length 1052.6
  Component Side w6: U1.B8@3818.9,2007.87 3838.58,1988.19 3838.58,1943.99 3938.06,1844.51 3942.89,1844.51 3966.8,1820.6 3966.8,1410.74 4065,1312.54 J1.B13@4065,1060
HDR4: J1.B14 U1.A7 | length 1041.6
  Component Side w6: U1.A7@3858.27,1968.5 3865.95,1960.82 3865.95,1933.59 3943.03,1856.51 3953.29,1856.51 3978.8,1831 3978.8,1415.71 4165,1229.51 J1.B14@4165,1060
HDR5: J1.B15 U1.B7 | length 1123.9
  Component Side w6: U1.B7@3858.27,2007.87 3877.95,1988.19 3877.95,1948.82 3879.24,1948.82 3907.88,1920.18 3907.88,1908.63 3948,1868.51 3959.55,1868.51 3990.8,1837.26 3990.8,1420.68 4265,1146.48 J1.B15@4265,1060
HDR6: J1.B16 U1.A6 | length 1117
  Component Side w6: U1.A6@3897.64,1968.5 3897.64,1948.82 3919.88,1926.58 3919.88,1913.61 3952.98,1880.51 3965.95,1880.51 4002.8,1843.65 4002.8,1425.65 4311.66,1116.79 4324.16,1116.79 4365,1075.94 J1.B16@4365,1060